# Altium PCB Module.PcbDoc
Units mil, origin at the board's own origin, x right, y up, seen from the top; angles counter-clockwise.
Board outline 6000 x 4000 mil, 2 copper layers (Top Layer, Bottom Layer); 31 components, 38 nets, 147 pads, 0 vias.
Unrouted connection lines stored in the file: 104.
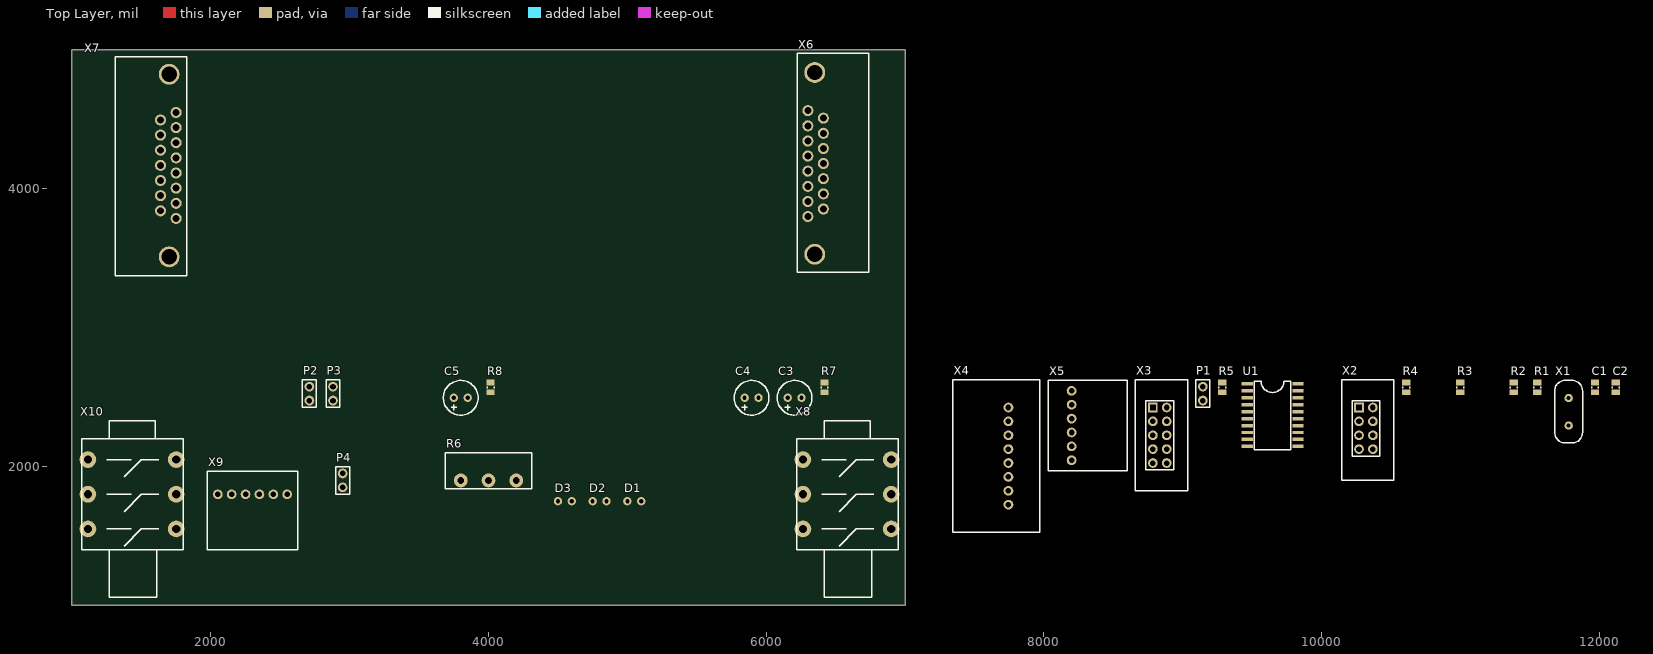
[diagram p0: Top Layer view]
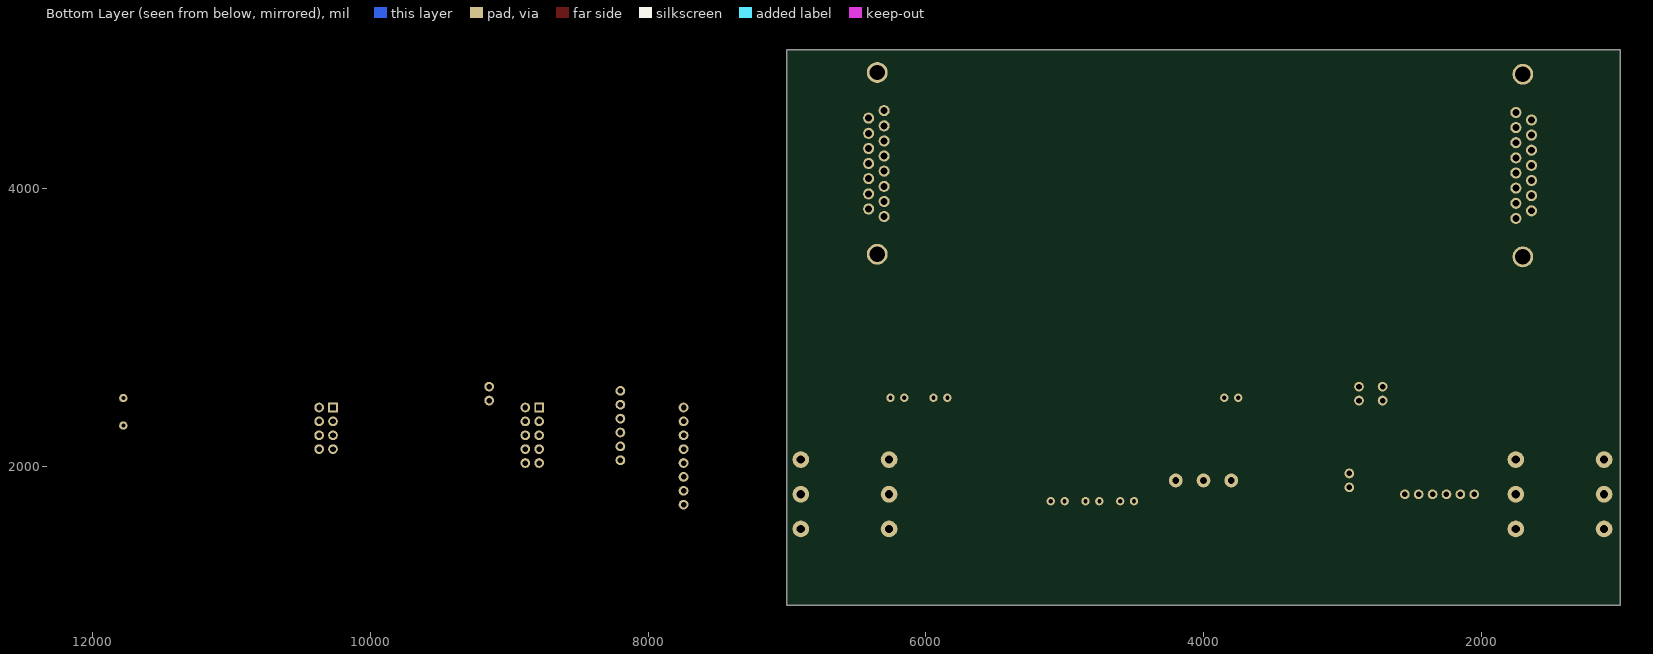
[diagram p1: Bottom Layer view, seen from below]

## Layer stack, top to bottom
Top Solder: solder mask 0.4, Solder Resist, Dk 3.5
Top Layer: signal copper 1.4
Dielectric 1: dielectric 12.6, FR-4, Dk 4.8
Bottom Layer: signal copper 1.4
Bottom Solder: solder mask 0.4, Solder Resist, Dk 3.5

## Board outline
1000,1000 7000,1000 7000,5000 1000,5000

## Design rules (kind name [scope] priority, off if disabled: settings)
Clearance [All] p1: gap=10
PolygonConnect [All] p1: connectstyle=Relief reliefconductorwidth=10 reliefentries=4 polygonreliefangle="90 Angle" airgapwidth=10
RoomDefinition Module [InComponentClass('Module')] p1: confinementstyle=ConfineIn formatcopy=TRUE lockcomponents=FALSE outline 1035,1040 12215,1040 12215,4995 1035,4995
RoutingVias [All] p1: holewidth=28 width=50 viastyle="Through Hole" minholewidth=28 minwidth=50 maxholewidth=28 maxwidth=50
SolderMaskExpansion [All] p1: expansion=4
Width [All] p1: maxlimit=10 minlimit=10 preferedwidth=10
29 further rules are at their usual default settings.

## Components (designator, comment, footprint, x,y, rotation, side; value= is the part's Value field where it differs from the comment)
C1 "Capacitor" 0805_Capacitor 11970,2610 r0 top
C2 "Capacitor" 0805_Capacitor 12120,2610 r0 top
C3 "Electrolytic Capacitor" ELEC_RAD10 6155,2495 r0 top
C4 "Electrolytic Capacitor" ELEC_RAD10 5845,2495 r0 top
C5 "Electrolytic Capacitor" ELEC_RAD10 3750,2495 r0 top
D1 "LED" LED-R1 5100,1750 r0 top
D2 "LED" LED-R1 4850,1750 r0 top
D3 "LED" LED-R1 4600,1750 r0 top
P1 "SIL-CONN-2" SIL-CONN-2-jumper 9145,2575 r0 top
P2 "SIL-CONN-2" SIL-CONN-2-jumper 2710,2575 r0 top
P3 "SIL-CONN-2" SIL-CONN-2-jumper 2880,2575 r0 top
P4 "SIL-CONN-2" SIL-CONN-2-jumper 2950,1950 r0 top
R1 "Resistor" 0805_Resistor 11555,2610 r0 top
R2 "Resistor" 0805_Resistor 11385,2610 r0 top
R3 "Resistor" 0805_Resistor 11000,2610 r0 top
R4 "Resistor" 0805_Resistor 10610,2610 r0 top
R5 "Resistor" 0805_Resistor 9285,2610 r0 top
R6 "Variable Resistor" "Variable Resistor" 3800,1900 r0 top
R7 "Resistor" 0805_Resistor 6420,2610 r0 top
R8 "Resistor" 0805_Resistor 4015,2610 r0 top
U1 "ATTINY2313A" SOIC20 9465,2595 r0 top
X1 "Crystal" HC49 11780,2495 r0 top
X2 "DIL-CONN-8" DIL-CONN-IDC-8 10270,2425 r0 top
X3 "DIL-CONN-10" DIL-CONN-IDC-10 8785,2425 r0 top
X4 "MOSFET_Switch_Serial" MOSFET_Switch_Serial 7745,2425 r0 top
X5 "MOSFET_Switch_Parallel" MOSFET_Switch_Parallel 8200,2545 r0 top
X6 "DB-15" DB15F 6300,3800 r270 top
X7 "DB-15" DB15M 1750,4550 r90 top
X8 "Jack 6.3" "Jack 6.3" 6900,1550 r180 top
X9 "MOSFET_Switch_Parallel" MOSFET_Switch_Parallel 2550,1800 r270 top
X10 "Jack 6.3" "Jack 6.3" 1750,1550 r180 top

## Footprints (in the part's own frame and the unit in brackets; to place one, negate y for a bottom-side part, rotate by r counter-clockwise, add the part's x,y. Pads: shape width x height; smd on the part's side, far side on the other; paste and mask are expansions set on the pad)
0805_Capacitor [mil]
  rect 60x40 smd: 1(0,-5) 2(0,-75)
  silkscreen extent -25,-45 25,-35, body extent -25,-79 25,-1, height 31
0805_Resistor [mil]
  rect 60x40 smd: 1(0,-5) 2(0,-75)
  silkscreen extent -25,-45 25,-35, body extent -25,-79 25,-1, height 31
DB15F [mil]
  round 80 hole 50: 1(-763,0) 2(-654,0) 3(-545,0) 4(-436,0) 5(-327,0) 6(-218,0) 7(-109,0) 8(0,0) 9(-709,112) 10(-600,112) 11(-491,112) 12(-382,112) 13(-273,112) 14(-164,112) 15(-55,112)
  round 150 hole 110: ""(-1038,50) ""(271,50)
  silkscreen extent -1175,-75 400,440, body extent -1163,-70 397,655, height 499
DB15M [mil]
  round 80 hole 50: 1(0,0) 2(-109,0) 3(-218,0) 4(-327,0) 5(-436,0) 6(-545,0) 7(-654,0) 8(-763,0) 9(-54,112) 10(-163,112) 11(-272,112) 12(-381,112) 13(-490,112) 14(-599,112) 15(-708,112)
  round 150 hole 110: ""(-1040,50) ""(275,50)
  silkscreen extent -1175,-75 400,440, body extent -1163,-70 397,670, height 499
DIL-CONN-IDC-8 [mil]
  rect 70x70 hole 40 square: 1(0,0)
  round 70 hole 40: 2(100,0) 3(0,-100) 4(100,-100) 5(0,-200) 6(100,-200) 7(0,-300) 8(100,-300)
  silkscreen extent -125,-525 250,200, body extent -126,-500 236,200, height 432
DIL-CONN-IDC-10 [mil]
  rect 70x70 hole 40 square: 1(0,0)
  round 70 hole 40: 2(100,0) 3(0,-100) 4(100,-100) 5(0,-200) 6(100,-200) 7(0,-300) 8(100,-300) 9(0,-400) 10(100,-400)
  silkscreen extent -125,-600 250,200, body extent -123,-600 235,200, height 366
ELEC_RAD10 [mil]
  round 60 hole 30: +(0,0) -(100,0)
  silkscreen extent -75,-125 175,125, body extent -74,-125 174,123, height 433
HC49 [mil]
  round 60 hole 30: 1(0,-2) 2(0,-200)
  silkscreen extent -100,-325 100,125, body extent -91,-318 93,122, height 531
"Jack 6.3" [mil]
  round 120 hole 60: 1(0,-500) 2(635,-500) 3(0,-250) 4(635,-250) 5(0,0) 6(635,0)
  silkscreen extent -50,-780 680,490, body extent -40,-771 677,481, height 657
LED-R1 [mil]
  round 60 hole 30: A(0,0) K(-100,0)
  body extent -110,-402 28,10, height 196
MOSFET_Switch_Parallel [mil]
  round 70 hole 40: 1(0,0) 2(0,-100) 3(0,-200) 4(0,-300) 5(0,-400) 6(0,-500)
  silkscreen extent -167,-575 400,75, body extent -167,-575 385,75, height 825
MOSFET_Switch_Serial [mil]
  round 70 hole 40: 1(0,0) 2(0,-100) 3(0,-200) 4(0,-300) 5(0,-400) 6(0,-500) 7(0,-600) 8(0,-700)
  silkscreen extent -400,-900 225,200, body extent -386,-900 225,200, height 2025
SIL-CONN-2-jumper [mil]
  round 70 hole 40: 1(0,0) 2(0,-100)
  silkscreen extent -50,-150 50,50, body extent -50,-150 50,50, height 356
SOIC20 [mil]
  rect 80x25 smd: 1(0,0) 2(0,-50) 3(0,-100) 4(0,-150) 5(0,-200) 6(0,-250) 7(0,-300) 8(0,-350) 9(0,-400) 10(0,-450) 11(365,-450) 12(365,-400) 13(365,-350) 14(365,-300) 15(365,-250) 16(365,-200) 17(365,-150) 18(365,-100) 19(365,-50) 20(365,0)
  silkscreen extent 50,-475 315,20, body extent -27,-481 392,31, height 105
"Variable Resistor" [mil]
  round 100 hole 50: 1(0,0) 2(400,0) 3(200,0)
  silkscreen extent -110,-60 510,200, body extent -110,-811 510,195, height 819

## Nets (pads, with @x,y where several pads share a name; then routed paths per layer and width w, separated by ;. In a path a pad name is that pad's centre, name@x,y a point inside that pad or via, vN(x,y) a via of type N, cw(c..) or ccw(c..) an arc to the next point about the centre after c; other vN are vias at no path point)
+4.5: R7.2 R8.1 X5.5 X9.5
+5: R2.2 R5.2 U1.20 X3.2 X4.5 X6.11 X7.11
+9: X4.8 X5.6 X6.9 X6.10 X7.9 X7.10 X9.6
AUX1: C3.+ X6.3 X7.3
AUX2: C4.+ X6.5 X7.5
BTN: U1.8 X4.6
C_AUX1: U1.16 X5.4
C_AUX2: P2.2 U1.17 X3.1
C_LAUX1: D2.A U1.18 X3.9
C_LAUX2: D3.A U1.19 X3.7
GND: C1.2 C2.2 P1.2 P4.2 R1.1 R3.1 R4.1 U1.10 X2.1 X2.3 X2.5 X2.7 X3.4 X3.6 X3.8 X3.10 X4.7 X5.3 X6.2 X6.4 X6.6 X6.12 X6.13 X7.2 X7.4 X7.6 X7.12 X7.13 X8.3 X8.4 X8.5 X8.6 X9.3 X10.3 X10.4 X10.5 X10.6
IN: X4.1 X5.2 X6.1 X9.2
LED: D1.A U1.9
MODE: P1.1 R5.1 U1.11
NetC1_1: C1.1 U1.4 X1.1
NetC2_1: C2.1 U1.5 X1.2
NetC3_-: C3.- R7.1 X5.1
NetC4_-: C4.- R8.2 X9.1
NetC5_+: C5.+ X10.1
NetC5_-: C5.- R6.2
NetD1_K: D1.K R1.2
NetD2_K: D2.K R3.2
NetD3_K: D3.K R4.2
NetP2_1: P2.1 X9.4
NetP3_1: P3.1 P4.1 R6.1
NetP3_2: P3.2 X4.2 X8.1 X8.2 X10.2
NetR6_3: R6.3 X4.3
NetU1_12: U1.12 X2.2
NetU1_13: U1.13 X2.4
NetU1_14: U1.14 X2.6
NetU1_15: U1.15 X2.8
OUT: X4.4 X7.1
R\E\: U1.7 X6.15 X7.15
R\E\S\E\T\: R2.1 U1.1 X3.5
RX: U1.2 X6.7 X7.7
TX: U1.3 X6.8 X7.8
W\E\: U1.6
W\R\: X6.14 X7.14
pads on no net: X3.3 X6. X7.